# EAGLE board axiom_beta_center_solder_on_v0.1-default.32b33ea7 (EAGLE 7.7.0)
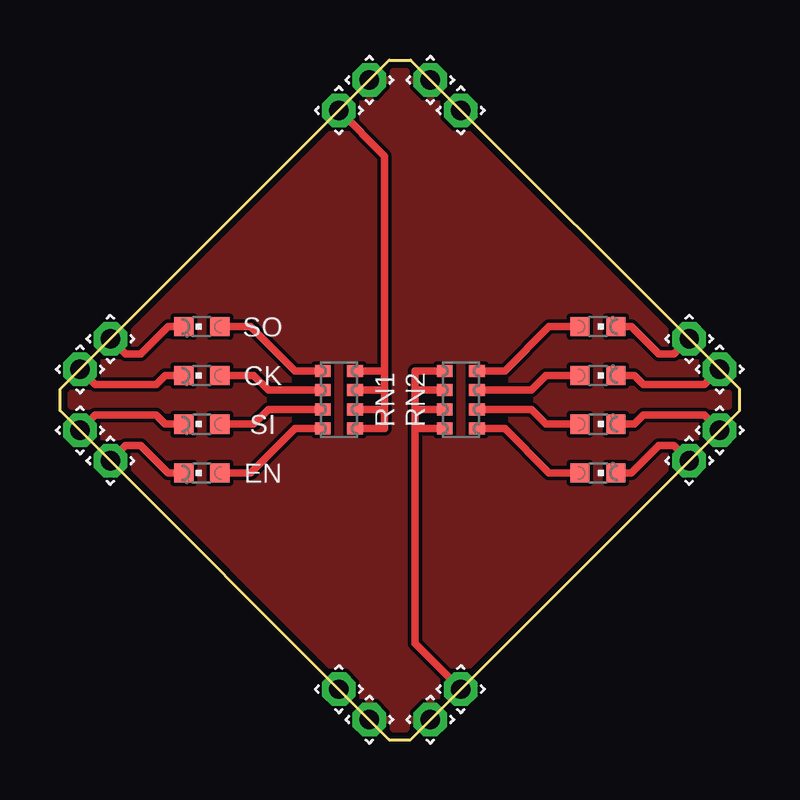
[diagram p0: board, top side]
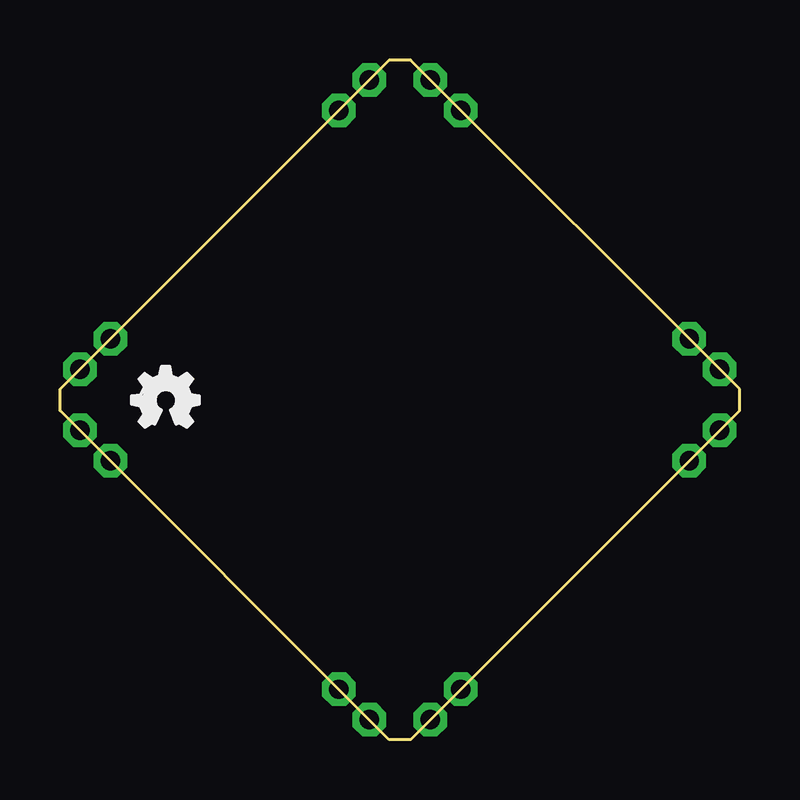
[diagram p1: board, bottom side, seen from below]

Size 28.34 x 28.34 mm. Coordinates in mm from the lower left corner, seen from the top.
Outline: 0,13.72 13.72,0 14.62,0 28.34,13.72 28.34,14.62 14.62,28.34 13.72,28.34 0,14.62 0,13.72
Copper layers (1*2*15*16): Top 0.035559375mm / dielectric 0.17018125mm / Route2 0.01778125mm / dielectric 47mil / Route15 0.01778125mm / dielectric 0.17018125mm / Bottom 0.035559375mm
Design rules "OSHPark-4layer-tuned *": minimum track width 5mil, minimum drill 10mil, track to track 6mil, track to pad 5mil, pad to pad 5mil, via to via 5mil, smd to smd 5mil, copper to edge 10mil, drill to drill 6mil, minimum pad ring 4mil, minimum via ring 4mil, stop-mask expansion 2mil, vias tented up to drill 100mil, thermal gap 6mil
Net classes: 0 default: width 0.152 mm, drill 0.254 mm; 1 power: width 0.152 mm, drill 0.254 mm

## Footprints (pad centres in the part's own frame; a part is rotated, then mirrored left to right if it is on the bottom)
CHIPLED_0603 = smd 0.8 x 0.8: A 0,-0.75; C 0,0.75
CAT16 = smd 0.5 x 0.65: 1 -1.2,-0.675; 2 -0.4,-0.675; 3 0.4,-0.675; 4 1.2,-0.675; 5 1.2,0.675; 6 0.4,0.675; 7 -0.4,0.675; 8 -1.2,0.675
1.4/0.8 = drill 0.8 pad 1.4 octagon: 1 0,0

## Placement (x,y rotation side)
CK  [CHIPLED_0603]  5.91,15.18 90 top
EN  [CHIPLED_0603]  5.91,11.12 90 top
LED5  [CHIPLED_0603]  22.42,11.12 270 top
LED6  [CHIPLED_0603]  22.42,13.15 270 top
LED7  [CHIPLED_0603]  22.42,15.18 270 top
LED8  [CHIPLED_0603]  22.42,17.22 270 top
LOGO1  OSHW_LOGO_FILLX0100-NT  [OSHW_FILLX100_NOTEXT]  25.34,13.03 0 bottom
RN1  [CAT16]  11.63,14.17 270 top
RN2  [CAT16]  16.71,14.17 90 top
SI  [CHIPLED_0603]  5.91,13.15 90 top
SO  [CHIPLED_0603]  5.91,17.22 90 top
U$1  PINPAD2.00MM  [1.4/0.8]  0.83,15.44 45 top
U$2  PINPAD2.00MM  [1.4/0.8]  0.83,12.9 45 top
U$3  PINPAD2.00MM  [1.4/0.8]  26.23,16.71 45 top
U$4  PINPAD2.00MM  [1.4/0.8]  2.1,11.63 225 top
U$5  PINPAD2.00MM  [1.4/0.8]  15.44,0.83 45 top
U$6  PINPAD2.00MM  [1.4/0.8]  15.44,27.5 45 top
U$11  PINPAD2.00MM  [1.4/0.8]  2.1,16.71 45 top
U$14  PINPAD2.00MM  [1.4/0.8]  27.5,12.9 45 top
U$15  PINPAD2.00MM  [1.4/0.8]  27.5,15.44 45 top
U$16  PINPAD2.00MM  [1.4/0.8]  26.23,11.63 45 top
U$17  PINPAD2.00MM  [1.4/0.8]  12.9,27.5 45 top
U$18  PINPAD2.00MM  [1.4/0.8]  11.63,26.23 45 top
U$19  PINPAD2.00MM  [1.4/0.8]  16.71,26.23 45 top
U$20  PINPAD2.00MM  [1.4/0.8]  12.9,0.83 45 top
U$21  PINPAD2.00MM  [1.4/0.8]  16.71,2.1 45 top
U$22  PINPAD2.00MM  [1.4/0.8]  11.63,2.1 45 top

## Library data of the parts
CK EN LED5-LED8 SI SO = led
LOGO1 = ohw-logo
RN1 RN2 = resistor-dil; OC_FARNELL: unknown; OC_NEWARK: unknown
U$1-U$6 U$11 U$14-U$22 = pinpad

## Nets
C_CK_E: LED6.C U$14.1
C_CK_W: CK.C U$1.1
C_EN_E: LED8.C U$3.1
C_EN_W: EN.C U$4.1
C_SI_E: LED7.C U$15.1
C_SI_W: SI.C U$2.1
C_SO_E: LED5.C U$16.1
C_SO_W: SO.C U$11.1
CSO_NE_V [power]: U$19.1
CSO_NW_V: RN1.5 RN1.6 RN1.7 RN1.8 U$18.1
CSO_SE_V: RN2.5 RN2.6 RN2.7 RN2.8 U$21.1
CSO_SW_V [power]: U$22.1
GND: U$5.1 U$6.1 U$17.1 U$20.1
N$1: RN1.1 SO.A
N$5: CK.A RN1.2
N$6: RN1.3 SI.A
N$7: EN.A RN1.4
N$14: LED5.A RN2.1
N$15: LED6.A RN2.2
N$16: LED7.A RN2.3
N$17: LED8.A RN2.4

## Tracks (layer width: path | path; a pad name or v marks a point on that pad's centre or on a via)
C_CK_E
  Top 0.305: U$14.1 26.87,13.53 24.33,13.53 23.95,13.15 LED6.C
C_CK_W
  Top 0.305: U$1.1 1.47,14.8 4.01,14.8 4.39,15.18 CK.C
C_EN_E
  Top 0.305: U$3.1 25.6,16.07 24.96,16.07 23.82,17.22 LED8.C
C_EN_W
  Top 0.305: U$4.1 2.74,12.26 3.37,12.26 4.52,11.12 EN.C
C_SI_E
  Top 0.305: U$15.1 26.87,14.8 24.33,14.8 23.95,15.18 LED7.C
C_SI_W
  Top 0.305: U$2.1 1.47,13.53 4.01,13.53 4.39,13.15 SI.C
C_SO_E
  Top 0.305: U$16.1 25.6,12.26 24.96,12.26 23.82,11.12 LED5.C
C_SO_W
  Top 0.305: U$11.1 2.74,16.07 3.37,16.07 4.52,17.22 SO.C
CSO_NW_V
  Top 0.305: RN1.5 13.53,12.97 13.53,13.77 | 13.53,14.57 13.53,15.37 | 13.53,15.37 RN1.8 | RN1.7 13.53,14.57 | 13.53,14.57 13.53,13.77 | RN1.6 13.53,13.77 | 13.53,15.37 13.53,24.33 U$18.1
CSO_SE_V
  Top 0.305: RN2.8 14.8,12.97 | 14.8,12.97 14.8,13.77 | 14.8,14.57 14.8,15.37 RN2.5 | RN2.6 14.8,14.57 | 14.8,14.57 14.8,13.77 | RN2.7 14.8,13.77 | 14.8,12.97 14.8,4.01 U$21.1
GND
  pour Top: -0.44,14.17 14.17,28.77 28.77,14.17 14.17,-0.44
N$1
  Top 0.305: SO.A 7.95,17.22 9.79,15.37 RN1.1
N$5
  Top 0.305: CK.A 8.07,15.18 8.69,14.57 RN1.2
N$6
  Top 0.305: SI.A 8.07,13.15 8.69,13.77 RN1.3
N$7
  Top 0.305: EN.A 7.95,11.12 9.79,12.97 RN1.4
N$14
  Top 0.305: LED5.A 20.39,11.12 18.54,12.97 RN2.1
N$15
  Top 0.305: LED6.A 20.26,13.15 19.65,13.77 RN2.2
N$16
  Top 0.305: LED7.A 20.26,15.18 19.65,14.57 RN2.3
N$17
  Top 0.305: LED8.A 20.39,17.22 18.54,15.37 RN2.4

## Text on the board
_tSilk: EN | SI | CK | SO
_bSilk: Debug / Center Solder On | Copyright (C) 2016 Herbert Pötzl / Licensed under CERN OHL v.1.2 | V0.1 / R1.0